# Altium PCB Dev_Board.PcbDoc
Units mm, origin at the board's own origin, x right, y up, seen from the top; angles counter-clockwise.
Board outline 70 x 60 mm, 2 copper layers (Top Layer, Bottom Layer); 59 components, 47 nets, 260 pads, 16 vias.
Unrouted connection lines stored in the file: 86.
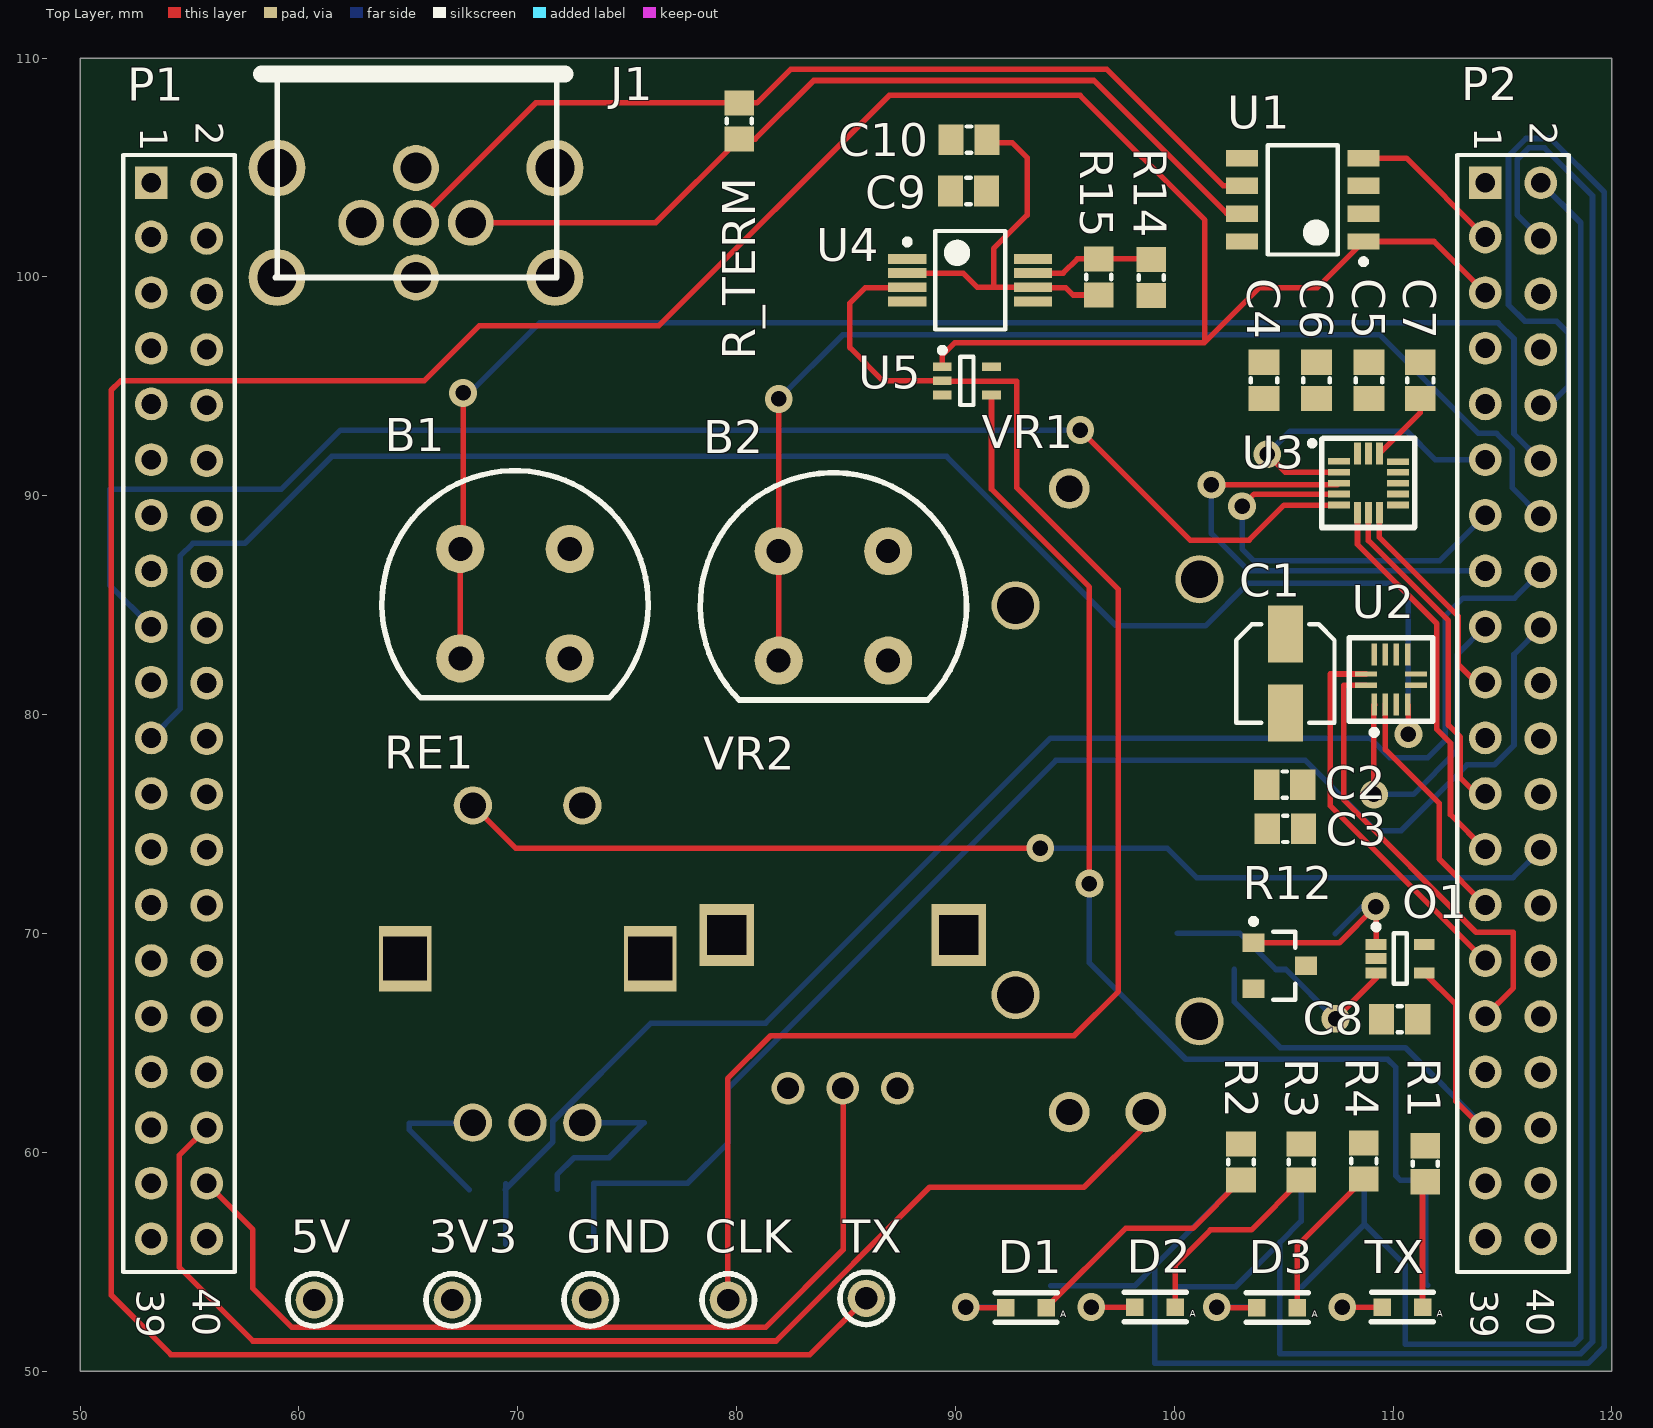
[diagram p0: Top Layer view]
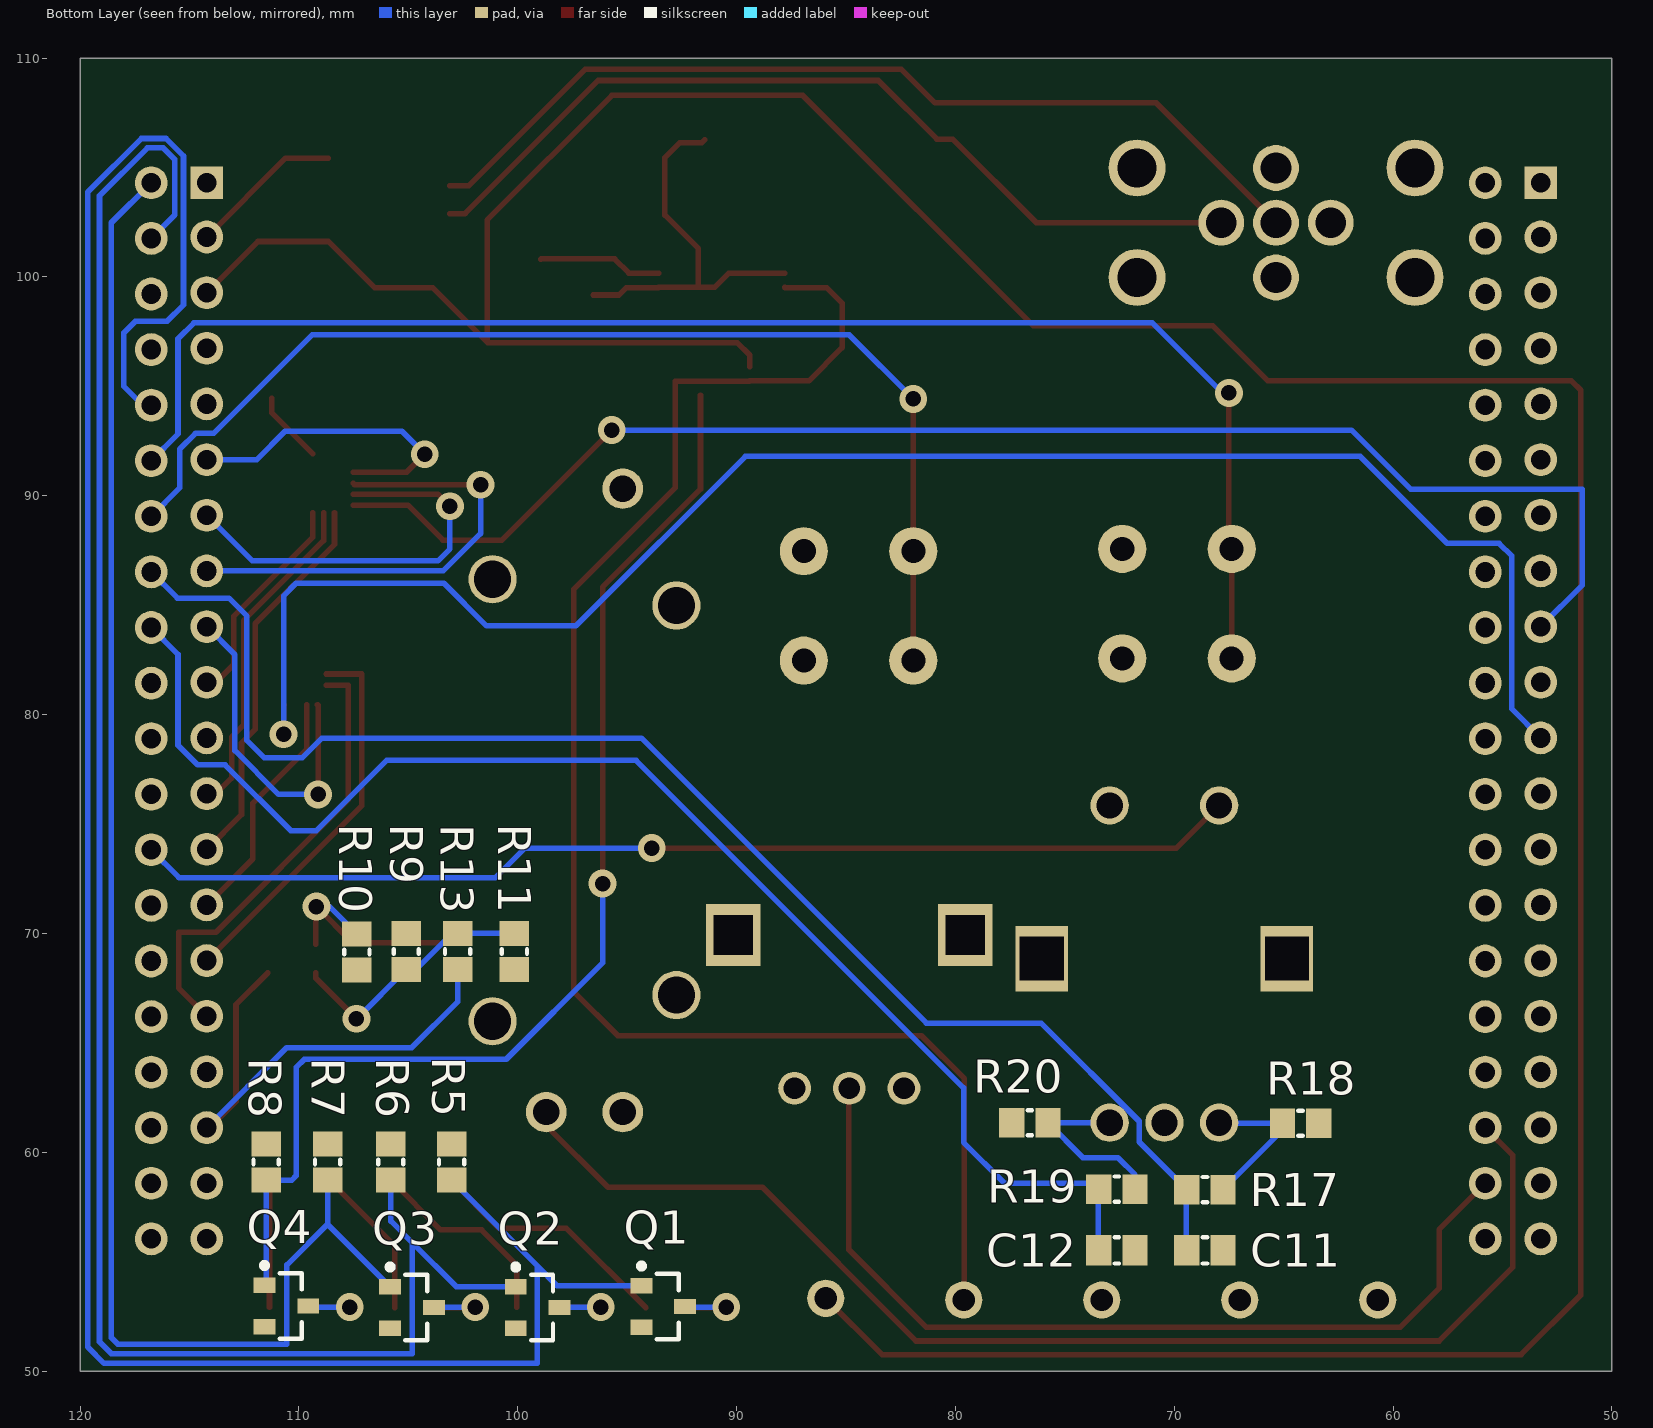
[diagram p1: Bottom Layer view, seen from below]
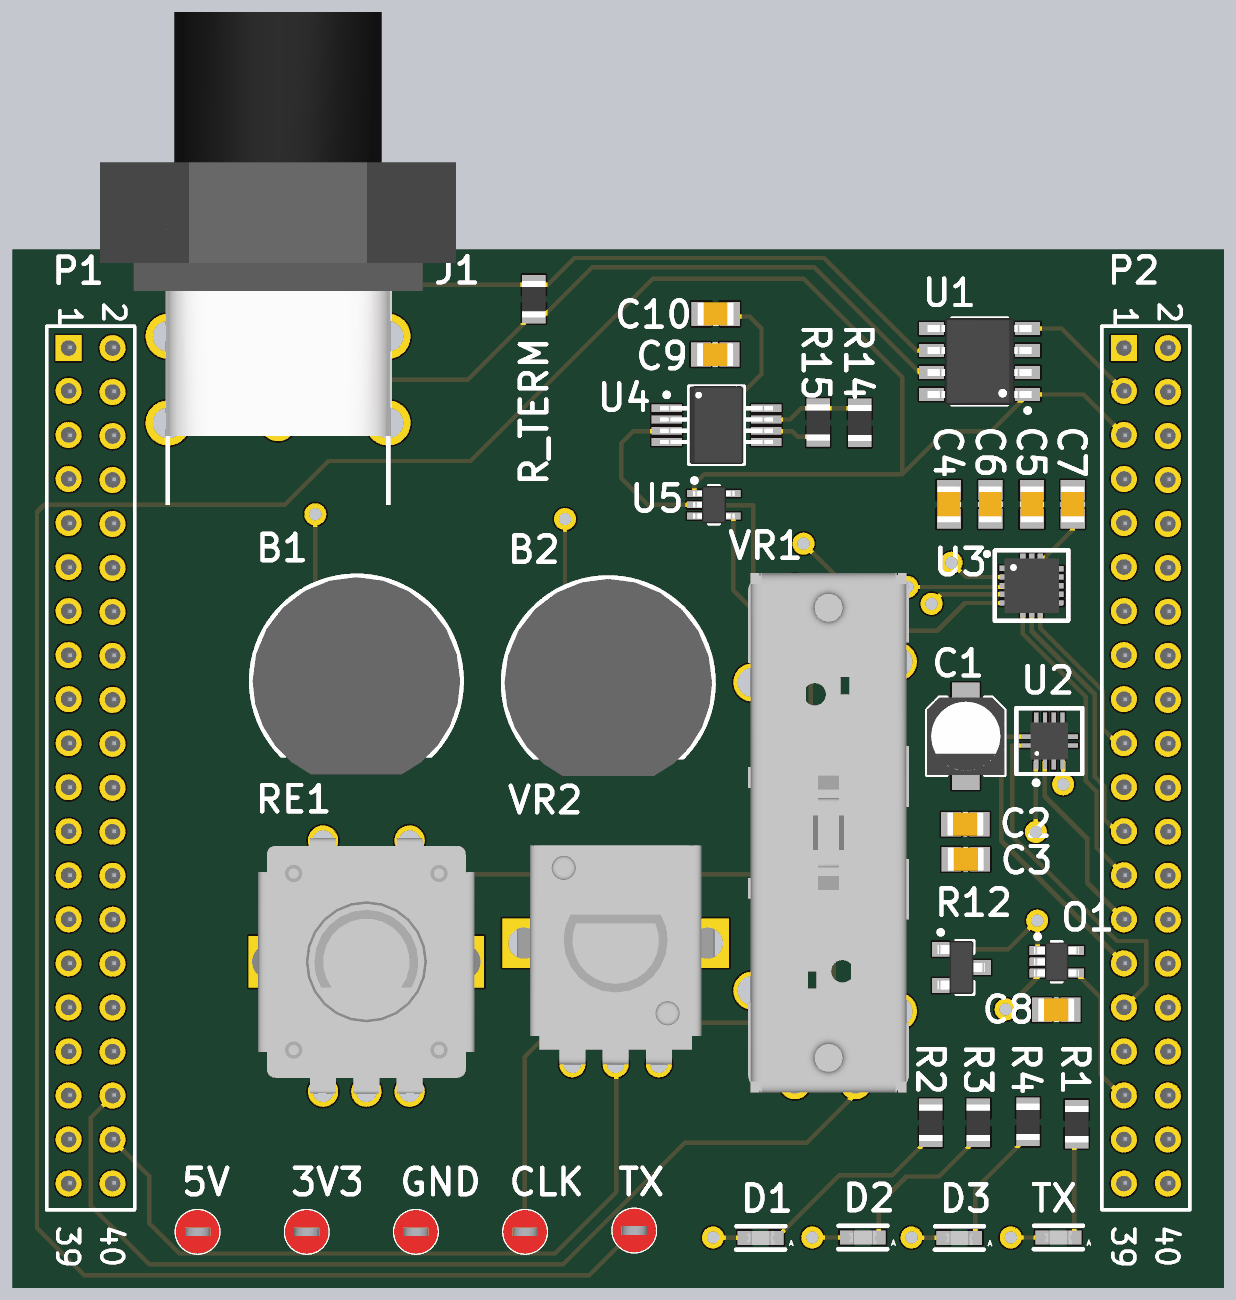
[diagram p2: 3D render of the assembled board from above, using the file's embedded part models]
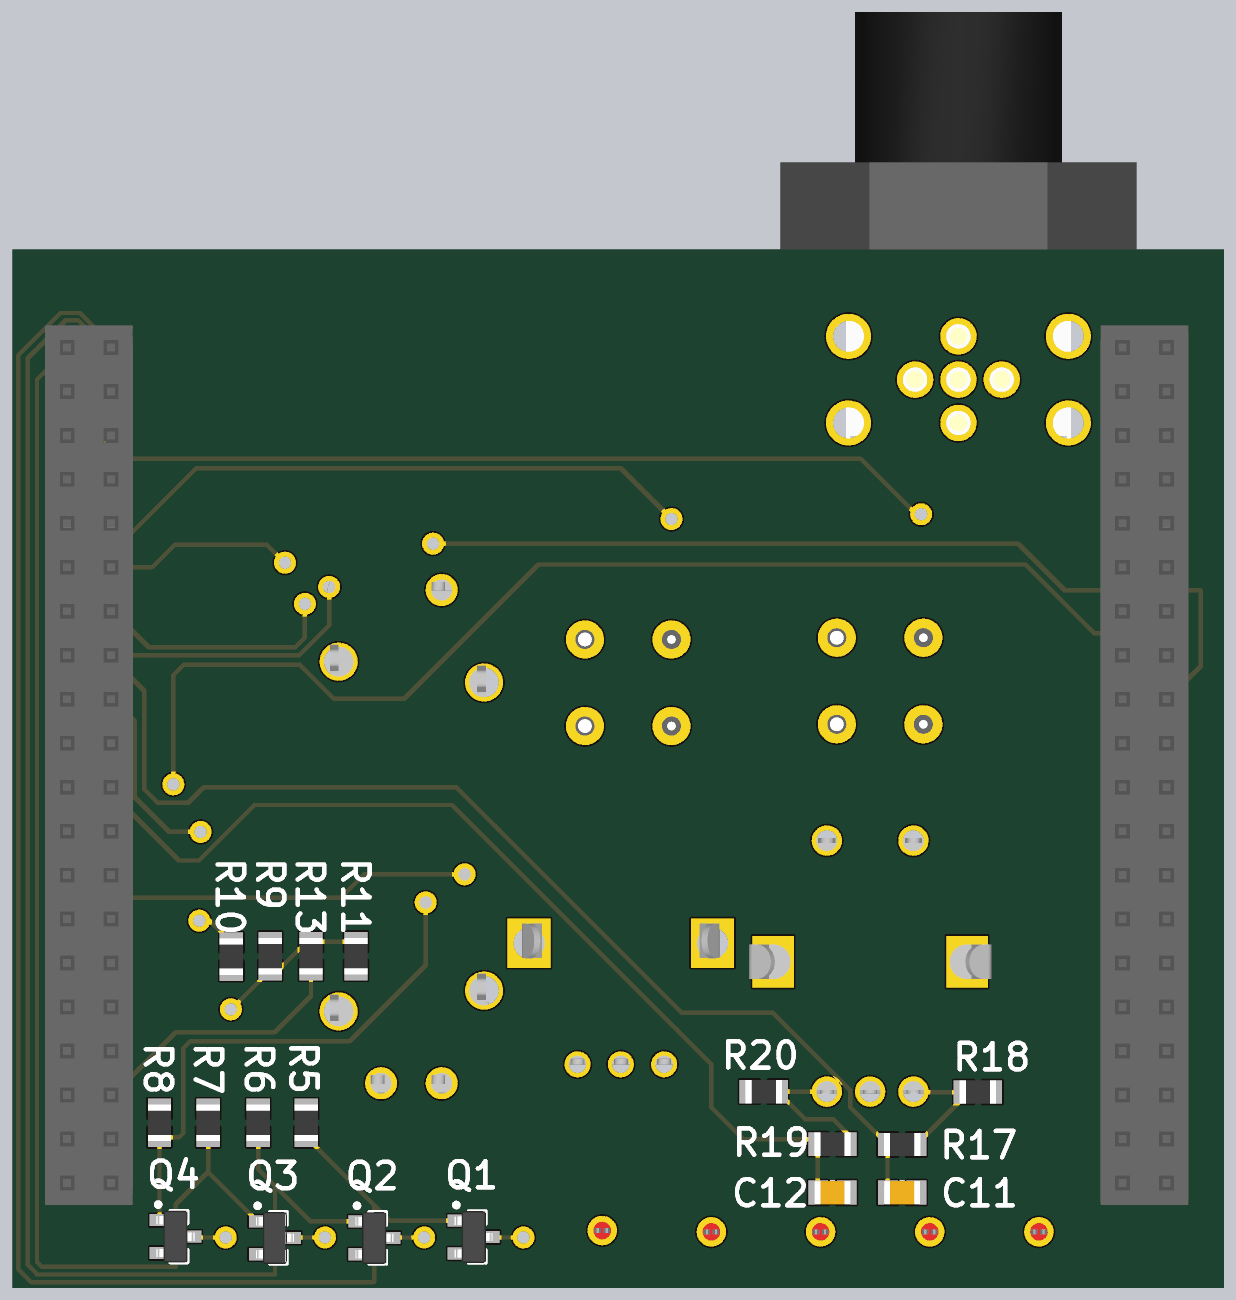
[diagram p3: 3D render of the assembled board from below, using the file's embedded part models]

## Layer stack, top to bottom
Top Solder: solder mask 0.0102, Solder Resist, Dk 3.5
Top Layer: signal copper 0.0356
Dielectric 1: dielectric 0.32, FR-4, Dk 4.8
Bottom Layer: signal copper 0.0356
Bottom Solder: solder mask 0.0102, Solder Resist, Dk 3.5

## Board outline
50,50 50,110 120,110 120,50

## Design rules (kind name [scope] priority, off if disabled: settings)
Clearance [All] p1: gap=0.254 ignorepadtopadclearanceinfootprint=TRUE except(0: Arc-Arc Arc-Track Arc-SMDPad Arc-THPad Arc-Via Arc-Fill Arc-Poly Arc-Region Arc-Text Arc-Hole Track-Track Track-SMDPad Track-THPad Track-Via Track-Fill Track-Poly Track-Region Track-Text Track-Hole SMDPad-Hole THPad-Hole Via-Hole Fill-Hole Poly-Hole Region-Hole Text-Hole)
PolygonConnect [All] p1: connectstyle=Relief reliefconductorwidth=0.254 reliefentries=4 polygonreliefangle="90 Angle" airgapwidth=0.254
RoomDefinition U_555_OSC [InComponentClass('U_555_OSC')] p1: confinementstyle=ConfineIn formatcopy=TRUE lockcomponents=FALSE outline 83.175,96.9 100.525,96.9 100.525,107.775 83.175,107.775
RoomDefinition TEST_POINTS [InComponentClass('Components Class 5')] p2: confinementstyle=ConfineIn formatcopy=TRUE lockcomponents=FALSE outline 57.925,58.85 89.675,58.85 89.675,49.525 57.925,49.525
RoomDefinition U_TEMP_SENSE [InComponentClass('U_TEMP_SENSE')] p3: confinementstyle=ConfineIn formatcopy=TRUE lockcomponents=FALSE outline 98.6,64.225 112.825,64.225 112.825,73.108 98.6,73.108
RoomDefinition U_INPUTS [InComponentClass('U_INPUTS')] p4: confinementstyle=ConfineIn formatcopy=TRUE lockcomponents=FALSE outline 60.525,51.768 103.9,51.768 103.9,93.185 60.525,93.185
RoomDefinition U_GYRO [InComponentClass('U_GYRO')] p5: confinementstyle=ConfineIn formatcopy=TRUE lockcomponents=FALSE outline 99.125,84.425 114.7,84.425 114.7,99.35 99.125,99.35
RoomDefinition U_Connector [InComponentClass('U_Connector')] p6: confinementstyle=ConfineIn formatcopy=TRUE lockcomponents=FALSE outline 54.383,94.175 82.45,94.175 82.45,124.251 54.383,124.251
RoomDefinition U_ACCELEROMETER [InComponentClass('U_ACCELEROMETER')] p7: confinementstyle=ConfineIn formatcopy=TRUE lockcomponents=FALSE outline 113.329,73.75 113.329,87.616 99.675,87.616 99.675,73.75
RoutingVias [All] p1: holewidth=0.711 width=1.27 viastyle="Through Hole" minholewidth=0.711 minwidth=1.27 maxholewidth=0.711 maxwidth=1.27
SolderMaskExpansion [All] p1: expansion=0.102
Width [All] p1: maxlimit=0.254 minlimit=0.254 preferedwidth=0.254
30 further rules are at their usual default settings.

## Classes and differential pairs
component class Main: 3V3 5V CLK D4 GND P1 P2
component class U_555_OSC: C9 C10 R14 R15 U4
component class U_ACCELEROMETER: C1 C2 C3 U2
component class U_Connector: J1 R_TERM
component class U_D-FLIP-FLOP: U5
component class U_GYRO: C4 C5 C6 C7
component class U_INPUTS: B1 B2 C11 C12 R17 R18 R19 R20 RE1 VR1 VR2
component class U_LEDS: D1 D2 D3 D4 Q1 Q2 Q3 Q4 R1 R2 R3 R4 R5 R6 R7 R8
component class U_TEMP_SENSE: C8 O1 R9 R10 R11 R12 R13
component class U_Transeiver: U1
component class "Components Class 1": 3V3 5V CLK D4 GND
component class "Components Class 2": P1 P2
component class "Components Class 3": D1 D2 D3 D4
component class "Components Class 4": C11 C12 D1 D2 D3 TX
component class "Components Class 5": 3V3 5V CLK GND TX

## Components (designator, comment, footprint, x,y, rotation, side; value= is the part's Value field where it differs from the comment)
3V3 "Keystone Electronics 5000" "TEST POINT 5000K" 67.006,53.25 r0 top (schematic designator TP3)
5V "Keystone Electronics 5000" "TEST POINT 5000K" 60.7,53.25 r0 top (schematic designator TP4)
B1 "D6R90 F1 LFS" MomentaryButton 69.875,85.068 r0 top
B2 "D6R90 F1 LFS" MomentaryButton 84.425,84.968 r0 top
C1 "875105240001" "Aluminum Cap 875105240001" 105.075,81.875 r270 top
C2 "C0805C104K5RACTU" CAP0805 105.05,76.8 r180 top
C3 "C0805C104K5RACTU" CAP0805 105.075,74.775 r180 top
C4 "C0805C104K5RACTU" CAP0805 104.1,95.275 r270 top
C5 "C0805C104K5RACTU" CAP0805 108.9,95.275 r270 top
C6 "C2012JB1V106K125AC" CAP0805 106.5,95.275 r270 top
C7 "CGA4C2C0G1H103J060AA" CAP0805 111.25,95.275 r270 top
C8 "C0805C104K5RACTU" CAP0805 110.3,66.075 r0 top
C9 "CGA4C2C0G1H103J060AA" CAP0805 90.6,103.925 r0 top
C10 "C2012JB1V106K125AC" CAP0805 90.625,106.275 r0 top
C11 "CGA4C2C0G1H103J060AA" CAP0805 68.6,55.518 r180 bottom
C12 "CGA4C2C0G1H103J060AA" CAP0805 72.625,55.518 r0 bottom
CLK "Keystone Electronics 5000" "TEST POINT 5000K" 79.619,53.25 r0 top (schematic designator TP2)
D1 "SMLE12BC7TT86" SMLE12BC7TT86 92.3,52.9 r0 top
D2 "SML-D12U8WT86" SML-D12U8WT86 98.2,52.925 r0 top
D3 "SML-D12M8WT86" SML-D12M8WT86 103.775,52.9 r0 top
GND "Keystone Electronics 5000" "TEST POINT 5000K" 73.313,53.25 r0 top (schematic designator TP5)
J1 "MOLEX 84864-9003" "MOLEX 84864-9003" 65.35,102.477 r0 top
O1 "MCP6241U" MCP6241U 110.325,68.85 r0 top
P1 "Female Header 20x2_BOTTOM" "FEMALE HDR2X20_BOTTOM" 53.25,104.3 r270 top locked
P2 "Female Header 20x2_BOTTOM" "FEMALE HDR2X20_BOTTOM" 114.21,104.3 r270 top locked
Q1 "2N7002P,215" 2N7002P,215 93.35,52.95 r180 bottom
Q2 "2N7002P,215" 2N7002P,215 99.092,52.905 r180 bottom
Q3 "2N7002P,215" 2N7002P,215 104.833,52.905 r180 bottom
Q4 "2N7002P,215" 2N7002P,215 110.575,52.975 r180 bottom
R1 "ERJ-6ENF64R9V" RES0805 111.475,59.475 r90 top
R2 "CRCW080588R7FKEA" RES0805 103.05,59.55 r90 top
R3 "RMCF0805JT56R0" RES0805 105.8,59.55 r90 top
R4 "RMCF0805JT56R0" RES0805 108.667,59.6 r90 top
R5 "RC0805FR-0710KL" RES0805 103.025,59.55 r270 bottom
R6 "RMCF0805FT10K0" RES0805 105.8,59.55 r270 bottom
R7 "RMCF0805FT10K0" RES0805 108.692,59.55 r270 bottom
R8 "RMCF0805FT10K0" RES0805 111.5,59.55 r270 bottom
R9 "RC0805FR-0756KL" RES0805 105.1,69.175 r90 bottom
R10 "RC0805FR-0756KL" RES0805 107.35,69.15 r270 bottom
R11 "ERJ-6ENF1131V" RES0805 100.15,69.175 r90 bottom
R12 "G-NICO-001" G-NICO-001 104.825,68.525 r0 top
R13 "RC0805FR-0739KL" RES0805 102.75,69.175 r270 bottom
R14 "ERJ-6ENF8871V" RES0805 98.95,99.975 r270 top
R15 "RC0805FR-0710KL" RES0805 96.55,100 r90 top
R17 "RC0805FR-0710KL" RES0805 68.6,58.293 r0 bottom
R18 "RC0805FR-0710KL" RES0805 64.225,61.325 r0 bottom
R19 "RC0805FR-0710KL" RES0805 72.625,58.318 r0 bottom
R20 "RC0805FR-0710KL" RES0805 76.6,61.35 r0 bottom
R_TERM "DNP" RES0805 80.125,107.125 r270 top (schematic designator R16)
RE1 "PEC12R-4217F-S0024" "Bourns Inc. PEC12R-4217F-S0024" 67.95,61.35 r0 top
TX "SML-511WWT86" SML-511WWT86 109.495,52.925 r0 top (schematic designator D4)
TX "Keystone Electronics 5000" "TEST POINT 5000K" 85.925,53.325 r0 top (schematic designator TP1)
U1 "SN65HVD234" SN65HVD234DR 105.875,103.525 r180 top
U2 "LIS2HH12TR" LIS2HH12TR 109.9,81.6 r90 top
U3 "L3GD20HTR" L3GD20HTR 108.875,90.575 r0 top
U4 "NE555PWR" TSOP65P650X120-8N 90.675,99.85 r0 top
U5 "SN74AUP1G79DCKR" SOT65P210X110-5N 90.525,95.25 r0 top
VR1 "PTA1543-2010CIB103" PTA1543-2010CIB103 96.95,76.085 r90 top
VR2 "PTV09A-4015F-B103" PTV09A-4015F-B103 84.85,62.925 r0 top

## Footprints (in the part's own frame and the unit in brackets; to place one, negate y for a bottom-side part, rotate by r counter-clockwise, add the part's x,y. Pads: shape width x height; smd on the part's side, far side on the other; paste and mask are expansions set on the pad)
2N7002P,215 [mm] "MOSFET N-CH 60V 0.36A SOT-23"
  rect 1x0.7 smd: D(1,0) G(-1,0.95) S(-1,-0.95)
  silkscreen extent -1.13,-1.5 0.7,1.97, body extent -1.1,-1.5 1.1,1.5, height 1.1
"Aluminum Cap 875105240001" [mm] "Aluminum Polymer Capacitor Radial, Can - SMD 45 mOhm 2000 Hrs @ 105°C"
  rect 2.6x1.6 smd: 1(-1.8,0) 2(1.8,0)
  silkscreen extent -2.25,-2.25 2.25,2.25, body extent -2.25,-2.25 2.25,2.25, height 6.3
"Bourns Inc. PEC12R-4217F-S0024" [mm] "ENCODER ROTARY"
  round 1.75 hole 1.2: 1(0,0) 2(2.5,0) 3(5,0) 4(0,14.5) 5(5,14.5)
  rect 2.4x3 hole 2 square unplated: 2(-3.1,7.5) 2(8.1,7.5)
  body extent -4.5,-0.1 9.5,14.65, height 17.5
CAP0805 [mm] "Capacitor with Footprint 0805"
  rect 1.15x1.4 smd: 1(-0.825,0) 2(0.825,0)
  silkscreen extent -0.1,-0.6 0.1,0.6, body extent -1.05,-0.67 1.05,0.68, height 1.55
"FEMALE HDR2X20_BOTTOM" [mm] "Connector; Header; 20x2 Position"
  rect 1.5x1.5 hole 0.9: 1(0,0)
  round 1.5 hole 0.9: 2(0,2.54) 3(2.475,0) 4(2.54,2.54) 5(5.019,0) 6(5.08,2.54) 7(7.562,0) 8(7.62,2.54) 9(10.106,0) 10(10.16,2.54) 11(12.649,0) 12(12.7,2.54) 13(15.193,0) 14(15.24,2.54) 15(17.737,0) 16(17.78,2.54) 17(20.28,0) 18(20.32,2.54) 19(22.824,0) 20(22.86,2.54) 21(25.367,0) 22(25.4,2.54) 23(27.911,0) 24(27.94,2.54) 25(30.455,0) 26(30.48,2.54) 27(32.998,0) 28(33.02,2.54) 29(35.542,0) 30(35.56,2.54) 31(38.086,0) 32(38.1,2.54) 33(40.629,0) 34(40.64,2.54) 35(43.173,0) 36(43.18,2.54) 37(45.716,0) 38(45.72,2.54) 39(48.26,0) 40(48.26,2.54)
  silkscreen extent -1.27,-1.27 49.78,3.81, body extent -1.31,-1.18 49.49,3.9, height 2.7
G-NICO-001 [mm] "RTD -55°C ~ 150°C TO-236-3, SC-59, SOT-23-3"
  rect 1x0.85 smd: 1(-1.2,1.05) 2(-1.2,-1.05) 3(1.2,0)
  silkscreen extent -1.32,-1.55 0.7,2.15, body extent -1.37,-1.53 1.37,1.53, height 1.12
L3GD20HTR [mm] "IC MEMS MOTION SENSOR 16LLGA"
  rect 1x0.31 smd: 1(-1.35,1) 2(-1.35,0.5) 3(-1.35,0) 4(-1.35,-0.5) 5(-1.35,-1) 9(1.35,-1) 10(1.35,-0.5) 11(1.35,0) 12(1.35,0.5) 13(1.35,0.975)
  rect 0.31x1 smd: 6(-0.5,-1.35) 7(0,-1.35) 8(0.5,-1.35) 14(0.5,1.35) 15(0,1.35) 16(-0.5,1.35)
  silkscreen extent -2.69,-2.02 2.12,2.05, body extent -1.58,-1.58 1.58,1.58, height 1
LIS2HH12TR [mm] "ACCELEROMETER 2-8G I2C/SPI 12LGA"
  rect 1x0.25 smd: 1(-1.143,0.762) 2(-1.143,0.254) 3(-1.143,-0.254) 4(-1.143,-0.762) 7(1.143,-0.762) 8(1.143,-0.254) 9(1.143,0.254) 10(1.143,0.762)
  rect 0.25x1 smd: 5(-0.254,-1.143) 6(0.254,-1.143) 11(0.254,1.143) 12(-0.254,1.143)
  silkscreen extent -2.54,-1.91 1.91,1.91, body extent -1.07,-1.07 1.08,1.08, height 1
MCP6241U [mm] "General Purpose Amplifier Circuit Rail-to-Rail SC-70-5"
  rect 0.95x0.5 smd: 1(-1.1,0.65) 2(-1.1,0) 3(-1.1,-0.65) 4(1.1,-0.65) 5(1.1,0.65)
  silkscreen extent -1.22,-1.15 0.3,1.57, body extent -1.3,-1.12 1.3,1.12, height 1.1
"MOLEX 84864-9003" [mm] "CONN RCPT MALE M12 5POS SLDR"
  round 2.1 hole 1.397: 1(0,2.502) 2(-2.502,0) 3(0,-2.502) 4(2.502,0) 5(0,0)
  round 2.6 hole 1.778: 6(6.35,2.502) 7(6.35,-2.502) 8(-6.35,2.502) 9(-6.35,-2.502)
  silkscreen extent -7.07,-2.5 6.82,6.8, body extent -10.28,-7.25 10.28,21.25, height 20.54
MomentaryButton [mm]
  round 2.2 hole 1.1: 1(2.5,2.5) 2(2.5,-2.5) 3(-2.5,-2.5) 4(-2.5,2.5)
  silkscreen extent -6.08,-4.3 6.08,6.08, body extent -6,-5.4 6,6, height 14.3
PTA1543-2010CIB103 [mm] "POT SLIDE 10K OHM .05W 15MM"
  round 1.85 hole 1.2: 1(-14.25,1.75) 2(-14.25,-1.75) 3(14.24,1.75)
  round 2.2 hole 1.7: 4(-8.9,4.2) 5(-10.1,-4.2) 6(8.9,4.2) 7(10.1,-4.2)
  body extent -14.79,-4.85 15.21,4.45, height 16.5
PTV09A-4015F-B103 [mm] "POT 10K OHM 1/20W CARBON LINEAR"
  round 1.5 hole 1: 1(-2.5,0) 2(0,0) 3(2.5,0)
  rect 2.5x2.85 hole 1.8 square: 4(-5.3,7) 5(5.3,7)
  body extent -5.7,0 5.7,12.65, height 15
RES0805 [mm] "Resistor with 0805 Footprint"
  rect 1.15x1.35 smd: 1(-0.825,0) 2(0.825,0)
  silkscreen extent -0.1,-0.58 0.1,0.58, body extent -1.05,-0.67 1.05,0.67, height 0.6
SML-511WWT86 [mm] "LED YELLOW DIFFUSED 0603 SMD"
  rect 0.8x0.8 smd: 1(0,0) 2(1.85,0)
  silkscreen extent -0.49,-0.67 2.35,0.67, body extent 0.13,-0.4 1.73,0.4, height 0.39
SML-D12M8WT86 [mm] "LED GREEN DIFFUSED 0603 SMD"
  rect 0.8x0.8 smd: 1(0,0) 2(1.85,0)
  silkscreen extent -0.49,-0.67 2.35,0.67, body extent 0.13,-0.4 1.73,0.4, height 0.39
SML-D12U8WT86 [mm] "LED RED DIFFUSED 0603 SMD"
  rect 0.8x0.8 smd: 1(0,0) 2(1.85,0)
  silkscreen extent -0.49,-0.67 2.35,0.67, body extent 0.13,-0.4 1.73,0.4, height 0.39
SMLE12BC7TT86 [mm] "LED BLUE CLEAR 0603 SMD"
  rect 0.8x0.8 smd: 1(0,0) 2(1.85,0)
  silkscreen extent -0.49,-0.67 2.35,0.67, body extent 0.13,-0.4 1.73,0.4, height 0.39
SN65HVD234DR [mm] "IC CAN TRANSCEIVER 3.3V 8-SOIC"
  rect 1.45x0.75 smd: 1(-2.775,1.905) 2(-2.775,0.635) 3(-2.775,-0.635) 4(-2.775,-1.905) 5(2.775,-1.905) 6(2.775,-0.635) 7(2.775,0.635) 8(2.775,1.905)
  silkscreen extent -2.9,-2.5 1.6,2.95, body extent -3,-2.5 3,2.5, height 1.75
SOT65P210X110-5N [mm] "SOT23, 5-Leads, Body 2.00x2.10mm, Pitch 0.65mm, IPC Medium Density"
  rect 0.85x0.4 smd: 1(-1.125,0.65) 2(-1.125,0) 3(-1.125,-0.65) 4(1.125,-0.65) 5(1.125,0.65)
  silkscreen extent -1.25,-1.1 0.3,1.52, body extent -1.2,-1.07 1.2,1.07, height 1.1
"TEST POINT 5000K" [mm] "Test Point, 5000 Keystone Series, 0.040\" Hole"
  round 1.7 hole 1.02 mask+0.1: 1(0,0)
  silkscreen extent -1.2,-1.2 1.2,1.2, body extent -1.27,-1.27 1.27,1.27, height 4.42
TSOP65P650X120-8N [mm] "TSOP, 8-Leads, Body 4.40x3.00mm, Pitch 0.65mm, IPC Medium Density"
  rect 1.75x0.45 smd: 1(-2.875,0.975) 2(-2.875,0.325) 3(-2.875,-0.325) 4(-2.875,-0.975) 5(2.875,-0.975) 6(2.875,-0.325) 7(2.875,0.325) 8(2.875,0.975)
  silkscreen extent -3,-2.25 1.6,2.25, body extent -3.25,-2.25 3.25,2.25, height 1.2

## Part data
3V3 5V CLK GND TX: "TEST POINT PC MINI .040\"D RED", Supplier Part Number 1=36-5000-ND, Mounting Type="0.040\" (1.02mm) Hole Diameter", Supplier 1=Digi-Key, Type="PC Test Point, Miniature"
B1 B2: "SWITCH PUSH SPST-NO 0.1A 32V", Current Rating="100ma (DC)", Supplier Part Number 1=401-1978-ND, Voltage Rating - DC=32V, Detailed Description="Pushbutton Switch SPST-NO Keyswitch Through Hole", Electrical Life="250,000 Cycles", Mounting Type="Through Hole", Supplier 1=Digi-Key, Switch Function=Off-Mom
C1: "CAP ALUM POLY 10UF 20% 10V SMD", Capacitance=10µF, ESR (Equivalent Series Resistance)="45 mOhm", Lifetime @ Temp.="2000 Hrs @ 105°C", Operating Temperature="-55°C ~ 105°C", Package / Case="Radial, Can - SMD", Ripple Current - High Frequency="1.2A @ 100kHz", Ripple Current - Low Frequency="60mA @ 120Hz", Supplier Part Number 1=732-6401-1-ND, Tolerance=±20%, Voltage - Rated=10V, Applications="General Purpose", Height - Seated (Max)="0.217\" (5.50mm)", Size / Dimension="0.157\" Dia (4.00mm)", Supplier 1=Digi-Key, Surface Mount Land Size="0.169\" L x 0.169\" W (4.30mm x 4.30mm)", Type=Polymer
C2 C3 C4 C5 C8: "CAP CER 0.1UF 50V X7R 0805", Capacitance=0.1µF, Package / Case=0805, Supplier Part Number 1=399-1170-1-ND, Temperature Coefficient=X7R, Tolerance=±10%, Voltage - Rated=50V, Supplier 1=Digi-Key
C6 C10: "CAP CER 10UF 35V JB 0805", Capacitance=10uF, Package / Case=0805, Supplier Part Number 1=445-11517-1-ND, Tolerance=±20%, Voltage - Rated=35V, Supplier 1=Digi-Key
C7 C11 C12: "CAP CER 10000PF 50V C0G 0805", Capacitance=10nF, Operating Temperature="-55°C ~ 125°C", Package / Case=0805, Supplier Part Number 1=445-6947-1-ND, Tolerance=±5%, Voltage - Rated=50V, Supplier 1=Digi-Key, Thickness=0.7mm
C9: "CAP CER 10000PF 50V C0G 0805", Capacitance=10nf, Operating Temperature="-55°C ~ 125°C", Package / Case=0805, Supplier Part Number 1=445-6947-1-ND, Tolerance=±5%, Voltage - Rated=50V, Supplier 1=Digi-Key, Thickness=0.7mm
D1: "LED BLUE CLEAR 0603 SMD", Color=Blue, Current - Test=5mA, Lens Color=Colorless, Millicandela Rating=22mcd, Package / Case=0603, Supplier Part Number 1=511-1589-1-ND, Voltage - Forward (Vf) (Typ)=2.9V, Lens Style/Size="Rectangle with Flat Top, 1.20mm x 0.80mm", Lens Transparency=Clear, Supplier 1=Digi-Key, Wavelength - Dominant=470nm
D2: "LED RED DIFFUSED 0603 SMD", Color=Red, Current - Test=20mA, Lens Color=White, Millicandela Rating=63mcd, Package / Case=0603, Supplier Part Number 1=511-1580-1-ND, Voltage - Forward (Vf) (Typ)=2.2V, Lens Transparency=Diffused, Supplier 1=Digi-Key, Wavelength - Dominant=620nm
D3: "LED GREEN DIFFUSED 0603 SMD", Color=Green, Current - Test=20mA, Lens Color=White, Millicandela Rating=25mcd, Package / Case=0603, Supplier Part Number 1=511-1578-1-ND, Voltage - Forward (Vf) (Typ)=2.2V, Lens Style/Size="Rectangle with Flat Top, 1.20mm x 0.80mm", Lens Transparency=Diffused, Supplier 1=Digi-Key, Wavelength - Dominant=572nm
J1: "CAN Micro-Change M12, Right Angle, Male", Current Rating=4A, Operating Temperature="-20°C ~ 80°C", Supplier Part Number 1=0848649003-ND, Voltage - Rated="250VAC, 250VDC", Contact Finish=Gold, Detailed Description="5 Position Circular Connector Receptacle, Male Pins Solder Gold", Fastening Type=Threaded, Ingress Protection="IP67 - Dust Tight, Waterproof", Orientation=Keyed, Shell Material, Finish="Brass, Nickel Plated", Supplier 1=Digi-Key
O1: "IC OPAMP GP 550KHZ RRO SC70-5", Current - Input Bias=1pA, Current - Output / Channel=23mA, Current - Supply=50µA, Operating Temperature="-40°C ~ 125°C", Package / Case="5-TSSOP, SC-70-5, SOT-353", Supplier Part Number 1=MCP6241UT-E/LTCT-ND, Voltage - Input Offset=5mV, Voltage - Supply, Single/Dual (±)="1.8 V ~ 5.5 V", -3db Bandwidth=-, Amplifier Type="General Purpose", Gain Bandwidth Product=550kHz, Number of Circuits=1, Output Type=Rail-to-Rail, Slew Rate="0.3 V/µs", Supplier 1=Digi-Key
P1 P2: "CONN HEADR FMALE 20POS .1\" DL AU", Supplier Part Number 1=S9197-ND, Supplier 1=Digi-Key
Q1 Q2 Q3 Q4: "MOSFET N-CH 60V 0.36A SOT-23", Current - Continuous Drain (Id) @ 25°C="360mA (Ta)", Drain to Source Voltage (Vdss)=60V, Drive Voltage (Max Rds On, Min Rds On)=10V, Input Capacitance (Ciss) (Max) @ Vds="50pF @ 10V", Package / Case="TO-236-3, SC-59, SOT-23-3", Power Dissipation (Max)="350mW (Ta)", Supplier Part Number 1=1727-4692-1-ND, FET Type=N-Channel, Gate Charge (Qg) (Max) @ Vgs="0.8nC @ 4.5V", Rds On (Max) @ Id, Vgs="1.6 Ohm @ 500mA, 10V", Supplier 1=Digi-Key, Technology="MOSFET (Metal Oxide)", Vgs (Max)=±20V, Vgs(th) (Max) @ Id  2.4V @=250µA
R1: "RES SMD 64.9 OHM 1% 1/8W 0805", Operating Temperature="-55°C ~ 155°C", Package / Case=0805, Power (Watts)="0.125W, 1/8W", Resistance="64.9 Ohms", Supplier Part Number 1=P64.9CCT-ND, Tolerance=±1%, Detailed Description="±1% 0.125W, 1/8W Chip Resistor 0805 (2012 Metric) Automotive AEC-Q200 Thick Film", Features="Automotive AEC-Q200", Height - Seated (Max)="0.028\" (0.70mm)", Supplier 1=Digi-Key
R2: "RES SMD 88.7 OHM 1% 1/8W 0805", Operating Temperature="-55°C ~ 155°C", Package / Case=0805, Power (Watts)="0.125W, 1/8W", Resistance=88.7, Supplier Part Number 1=541-88.7CCT-ND, Tolerance=±1%, Supplier 1=Digi-Key
R3 R4: "RES SMD 56 OHM 5% 1/8W 0805", Package / Case=0805, Power (Watts)="0.125W, 1/8W", Resistance (Ohms)=56, Supplier Part Number 1=RMCF0805JT56R0CT-ND, Composition="Thick Film", Supplier 1=Digi-Key
R5 R15 R17 R18 R19 R20: "RES SMD 10K OHM 1% 1/8W 0805", Manufacturer=Yageo, Operating Temperature="-55°C ~ 155°C", Package / Case=0805, Power (Watts)="0.125W, 1/8W", Resistance="10 kOhms", Supplier Part Number 1=311-10.0KCRCT-ND, Temperature Coefficient=±100ppm/°C, Tolerance=±1%, Composition="Thick Film", Features="Moisture Resistant", Supplier 1=Digi-Key
R6 R7 R8: "RES SMD 10K OHM 1% 1/8W 0805", Package / Case=0805, Power (Watts)="0.125W, 1/8W", Resistance="10 kOhms", Supplier Part Number 1=RMCF0805FT10K0CT-ND, Tolerance=±1%, Features="Automotive AEC-Q200", Height - Seated (Max)="0.026\" (0.65mm)", Supplier 1=Digi-Key
R9 R10: "RES SMD 56K OHM 1% 1/8W 0805", Operating Temperature="-55°C ~ 155°C", Package / Case=0805, Power (Watts)="0.125W, 1/8W", Resistance=56k, Supplier Part Number 1=311-56.0KCRCT-ND, Temperature Coefficient=±100ppm/°C, Tolerance=±1%, Composition="Thick Film", Features="Moisture Resistant", Supplier 1=Digi-Key
R11: "RES SMD 1.13K OHM 1% 1/8W 0805", Operating Temperature="-55°C ~ 155°C", Power (Watts)="0.125W, 1/8W", Resistance="1.13 kOhms", Supplier Device Package=0805, Supplier Part Number 1=P1.13KCCT-ND, Tolerance=±1%, Detailed Description="±1% 0.125W, 1/8W Chip Resistor 0805 (2012 Metric) Automotive AEC-Q200 Thick Film", Features="Automotive AEC-Q200", Height - Seated (Max)="0.028\" (0.70mm)", Supplier 1=Digi-Key
R12: "SENSOR TEMP RTD 1.0K OHM SOT23", Current=5mA, Manufacturer="TE Connectivity Measurement Specialties", Package / Case="TO-236-3, SC-59, SOT-23-3", Resistance="1 kOhms", Supplier Part Number 1=223-1563-1-ND, Temperature="-55°C ~ 150°C", Supplier 1=Digi-Key, Thermistor Type=RTD
R13: "RES SMD 39K OHM 1% 1/8W 0805", Operating Temperature="-55°C ~ 155°C", Package / Case=0805, Power (Watts)="0.125W, 1/8W", Resistance=39k, Supplier Part Number 1=311-39.0KCRCT-ND, Temperature Coefficient=±100ppm/°C, Tolerance=±1%, Composition="Thick Film", Features="Moisture Resistant", Supplier 1=Digi-Key
R14: "RES SMD 8.87K OHM 1% 1/8W 0805", Operating Temperature="-55°C ~ 155°C", Package / Case=0805, Power (Watts)="0.125W, 1/8W", Resistance="8.87 kOhms", Tolerance=±1%, Features="Automotive AEC-Q200", Height - Seated (Max)="0.028\" (0.70mm)", Supplier 1=Digi-Key
R_TERM: "RES SMD 0.0 OHM JUMPER 1/8W 0805", Package / Case=0805, Power (Watts)="0.125W, 1/8W", Resistance="0 Ohms", Tolerance=Jumper, Supplier 1=Digi-Key, Supplier Part Number 2=311-0.0ARCT-ND
RE1: "ENCODER ROTARY", Supplier Part Number 1=PEC12R-4217F-S0024-ND, Voltage - Supply=-, Actuator Type="6mm Dia Flatted End", Built in Switch=Yes, Detent=Yes, Encoder Type=Mechanical, Mounting Type="PCB, Through Hole", Orientation=Vertical, Output Type="Quadrature (Incremental)", Pulses per Revolution=24, Rotational Life (Cycles Min)=30K, Supplier 1=Digi-Key
TX: "LED YELLOW DIFFUSED 0603 SMD", Colour=Yellow, Current - Test=20mA, Lens Colour=White, Millicandela Rating=40mcd, Package / Case=0603, Voltage - Forward (Vf) (Type)=2V, Detailed Description="Yellow 590nm LED Indication - Discrete 2V 0603 (1608 Metric)", Height - Max=0.65mm, Lens Style/Size="Rectangle with Flat Top, 1.20mm x 0.80mm", Lens Transparancy=Diffused, Mounting Type="Surface Mount", Supplier 1=Digi-Key, Wavelength - Dominant=590nm
U1: "IC CAN TRANSCEIVER 3.3V 8-SOIC", Manufacturer Part Number=SN65HVD234DR, Operating Temperature="-40°C ~ 125°C", Package / Case=8-SOIC, Supplier Part Number 1=296-27991-1-ND, Voltage - Supply="3 V ~ 3.6 V", Data Rate=1Mbps, Duplex=Half, Number of Drivers/Receivers=1/1, Protocol=CAN, Receiver Hysteresis=100mV, Supplier 1=Digi-Key, Type=Transceiver
U2: "ACCELEROMETER 2-8G I2C/SPI 12LGA", Operating Temperature="-40°C ~ 85°C (TA)", Package / Case=12-VFLGA, Supplier Part Number 1=497-15069-1-ND, 1.71 V ~ 3.6 V="Voltage - Supply", Acceleration Range="±2g, 4g, 8g", Axis="X, Y, Z", Bandwidth="5Hz ~ 400Hz", Features="Adjustable Bandwidth, Selectable Scale, Temperature Sensor", Output Type="I²C, SPI", Sensitivity (LSB/g)="16393 (±2g) ~ 4098 (±8g)", Supplier 1=Digi-Key, Type=Digital
U3: "IC MEMS MOTION SENSOR 16LLGA", Current - Supply=5mA, Manufacturer=STMicroelectronics, Operating Temperature="-40°C ~ 85°C (TA)", Package / Case=16-LGA, Supplier Part Number 1=497-13931-1-ND, Voltage - Supply="2.2 V ~ 3.6 V", Axis="X (Pitch), Y (Roll), Z (Yaw)", Bandwidth="6.25Hz ~ 400Hz", Output Type="I²C, SPI", Range °/s="±245, 500, 2000", Sensitivity (LSB/(°/s))="8.75 ~ 70", Supplier 1=Digi-Key, Type=Digital
U4: "IC OSC SGL TIMER 100KHZ 8TSSOP", Current - Supply=10mA, Frequency=100kHz, Operating Temperature="0°C ~ 70°C", Package / Case="8-TSSOP (0.173\", 4.40mm Width)", Supplier Part Number 1=296-29904-1-ND, Voltage - Supply="4.5 V ~ 16 V", Detailed Description="555 Type, Timer/Oscillator (Single) IC 100kHz 8-TSSOP", Mounting Type="Surface Mount", Supplier 1=Digi-Key, Type="555 Type, Timer/Oscillator (Single)"
U5: "IC D-TYPE POS TRG SNGL SC70-5", Clock Frequency=266MHz, Current - Quiescent (Iq)=500nA, Input Capacitance=1.5pF, Operating Temperature="-40°C ~ 85°C (TA)", Package / Case="5-TSSOP, SC-70-5, SOT-353", Supplier Part Number 1=296-17660-1-ND, Voltage - Supply="0.8 V ~ 3.6 V", Max Propagation Delay @ V, Max CL="5.8ns @ 3.3V, 30pF", Number of Bits per Element=1, Number of Elements=1, Output Type=Non-Inverted, Supplier 1=Digi-Key, Trigger Type="Positive Edge", Type=D-Type
VR1: "POT SLIDE 10K OHM .05W 15MM", Power (Watts)="0.05W, 1/20W", Resistance="10 kOhms", Supplier Part Number 1=PTA1543-2010CIB103-ND, Tolerance=±20%, Detailed Description="0.05W, 1/20W Through Hole Slide Potentiometer Top Adjustment Type", Fader Type=Standard, Mounting Type="Through Hole", Supplier 1=Digi-Key, Travel Range=15mm
VR2: "POT 10K OHM 1/20W CARBON LINEAR", Power (Watts)="0.05W, 1/20W", Resistance (Ohms)=10k, Supplier Part Number 1=PTV09A-4015F-B103-ND, Tolerance=±20%, Built in Switch=None, Detailed Description="10k Ohm Gang Linear Through Hole, Snap In Potentiometer None 1 Turn Carbon 0.05W, 1/20W PC Pins, Board Locks", Mounting Type="Through Hole, Snap In", Rotation=280°, Supplier 1=Digi-Key, Termination Style="PC Pins, Board locks"

## Via types
v1: diameter 1.27, hole 0.711, Top Layer to Bottom Layer, 16 vias

## Nets (pads, with @x,y where several pads share a name; then routed paths per layer and width w, separated by ;. In a path a pad name is that pad's centre, name@x,y a point inside that pad or via, vN(x,y) a via of type N, cw(c..) or ccw(c..) an arc to the next point about the centre after c; other vN are vias at no path point)
3V3: 3V3.1 C1.1 C2.2 C3.2 C4.2 C5.2 C6.2 C8.2 O1.5 P1.16 R1.2 R2.2 R3.2 R4.2 R9.2 R10.2 U1.3 U1.5 U2.9 U2.10 U3.1 U3.16 U5.5 VR1.1 VR2.1
5V: 5V.1 C9.2 P1.18 R14.2 R18.1 R20.2 U4.4 U4.8
BUTTON_1: B1.3 B1.4 P2.12 | length 67.9
  Top Layer w0.254: B1.3 B1.4 67.5,87.693 v1(67.5,94.7)
  Bottom Layer w0.254: v1(67.5,94.7) 67.8,94.7 71,97.9 114.8,97.9 115.525,97.175 115.525,92.825 P2.12
BUTTON_2: B2.3 B2.4 P2.14 | length 52.5
  Top Layer w0.254: B2.3 B2.4 v1(81.925,94.425)
  Bottom Layer w0.254: v1(81.925,94.425) 84.85,97.35 109.4,97.35 113.9,92.85 114.725,92.85 115.45,92.125 115.45,90.36 P2.14
CAN_RX: P2.3 U1.4 | length 7.1
  Top Layer w0.254: U1.4 110.605,105.43 P2.3
CAN_TX: P2.5 TX.1@85.925,53.325 U1.1 U5.1 | length 170
  Top Layer w0.254: TX.1@85.925,53.325 83.35,50.75 54.15,50.75 51.425,53.475 51.425,94.825 51.85,95.25 65.725,95.25 68.25,97.775 76.45,97.775 86.975,108.3 95.7,108.3 101.4,102.6 101.4,97.025 ; U5.1 89.4,96.425 89.975,97 101.375,97 101.4,97.025 ; P2.5 111.871,101.62 U1.1 106.53,99.5 103.875,99.5 101.4,97.025
GND: B1.1 B1.2 B2.1 B2.2 C1.2 C2.1 C3.1 C4.1 C5.1 C6.1 C7.1 C8.1 C9.1 C10.1 C11.2 C12.1 GND.1 J1.3 J1.6 J1.7 J1.8 J1.9 O1.2 P1.20 P1.22 Q1.S Q2.S Q3.S Q4.S R5.1 R6.1 R7.1 R8.1 R11.1 R12.2 RE1.2 RE1.5 U1.2 U1.8 U2.3 U2.5 U2.6 U2.7 U2.8 U3.9 U3.10 U3.11 U3.12 U3.13 U3.15 U4.1 U5.3 VR1.3 VR2.3
I2C1_SCL: P2.17 U2.1 | length 15
  Top Layer w0.254: v1(109.125,76.35) 109.125,80.42 109.15,80.445 U2.1
  Bottom Layer w0.254: v1(109.125,76.35) 110.925,76.35 112.925,78.35 112.925,82.735 P2.17
I2C1_SDA: P1.21 U2.4 | length 78.8
  Top Layer w0.254: U2.4 110.7,80.419 v1(110.7,79.1)
  Bottom Layer w0.254: P1.21 54.575,80.258 54.575,87.25 55.15,87.825 57.525,87.825 61.5,91.8 89.6,91.8 97.35,84.05 101.425,84.05 103.375,86 110.125,86 110.7,85.425 v1(110.7,79.1)
NetC7_2: C7.2 U3.14 | length 3.3
  Top Layer w0.254: U3.14 111.25,93.8 C7.2
NetC10_2: C10.2 R15.1 U4.2 U4.6 | length 17.9
  Top Layer w0.254: U4.2 90.35,100.175 91,99.525 91.75,99.525 ; C10.2 91.6,106.125 92.6,106.125 93.275,105.45 93.275,102.825 91.75,101.3 91.75,99.525 ; R15.1 95.375,99.175 95.05,99.5 93.575,99.5 U4.6 91.75,99.525
NetD1_1: D1.1 Q1.D | length 3.7
  Top Layer w0.254: v1(90.475,52.925) 90.5,52.9 D1.1
  Bottom Layer w0.254: v1(90.475,52.925) 92.325,52.925 Q1.D
NetD1_2: D1.2 R2.1 | length 11.3
  Top Layer w0.254: D1.2 97.775,56.525 100.85,56.525 R2.1
NetD2_1: D2.1 Q2.D | length 3.9
  Top Layer w0.254: v1(96.208,52.925) D2.1
  Bottom Layer w0.254: v1(96.208,52.925) 98.072,52.925 Q2.D
NetD2_2: D2.2 R3.1 | length 9.3
  Top Layer w0.254: D2.2 100.05,54.85 101.65,56.45 103.525,56.45 R3.1
NetD3_1: D3.1 Q3.D | length 3.7
  Top Layer w0.254: v1(101.942,52.925) 101.967,52.9 D3.1
  Bottom Layer w0.254: v1(101.942,52.925) 103.813,52.925 Q3.D
NetD3_2: D3.2 R4.1 | length 7.1
  Top Layer w0.254: D3.2 105.625,55.733 R4.1
NetD4_1: Q4.D TX.1@109.495,52.925 | length 3.7
  Top Layer w0.254: v1(107.675,52.925) TX.1@109.495,52.925
  Bottom Layer w0.254: v1(107.675,52.925) 109.525,52.925 Q4.D
NetD4_2: R1.1 TX.2 | length 5.8
  Top Layer w0.254: TX.2 111.345,58.52 R1.1
NetJ1_4: J1.4 R_TERM.2 U1.7 | length 40.5
  Top Layer w0.254: J1.4 76.302,102.477 R_TERM.2 80.85,106.3 83.525,108.975 96.325,108.975 102.41,102.89 U1.7
NetJ1_5: J1.5 R_TERM.1 U1.6 | length 42.9
  Top Layer w0.254: J1.5 70.823,107.95 R_TERM.1 80.927,107.95 82.477,109.5 96.908,109.5 102.248,104.16 U1.6
NetO1_1: O1.1 R10.1 R12.1 | length 10.4
  Top Layer w0.254: R12.1 107.55,69.575 v1(109.2,71.225) 109.225,71.2 O1.1
  Bottom Layer w0.254: R10.1 108.6,71.225 v1(109.2,71.225)
NetO1_3: O1.3 R9.1 R11.2 R13.1 | length 11.7
  Top Layer w0.254: v1(107.375,66.1) 109.225,67.95 O1.3
  Bottom Layer w0.254: R11.2 R13.1 103,70 104.65,68.35 R9.1 107.35,66.1 v1(107.375,66.1)
NetO1_4: O1.4 P2.35 R13.2 | length 23.6
  Top Layer w0.254: O1.4 112.875,66.75 112.875,62.325 114.073,61.127 P2.35
  Bottom Layer w0.254: R13.2 102.75,66.875 104.85,64.775 110.562,64.775 P2.35
NetP1_36: P1.36 VR1.2 | length 57.2
  Top Layer w0.254: P1.36 54.525,59.855 54.525,54.75 57.9,51.375 81.8,51.375 88.825,58.4 95.875,58.4 98.7,61.225 VR1.2
NetP1_38: P1.38 VR2.2 | length 42.2
  Top Layer w0.254: P1.38 57.9,56.47 57.9,53.775 59.675,52 81.325,52 84.875,55.55 84.875,62.9 VR2.2
NetP2_2: P2.2 Q3.G R7.2 | length 74
  Bottom Layer w0.254: Q3.G 105.838,53.855 108.692,56.708 ; R7.2 108.692,56.708 ; P2.2 118.575,102.475 118.575,51.525 118.275,51.225 110.55,51.225 110.55,54.85 108.692,56.708
NetP2_4: P2.4 Q2.G R6.2 | length 89.4
  Bottom Layer w0.254: Q2.G 102.805,53.855 104.825,55.875 ; 104.825,50.787 118.575,50.787 ; 104.825,50.8 104.825,55.875 ; R6.2 105.8,56.85 104.825,55.875 ; P2.4 115.675,102.835 115.675,105.375 116.2,105.9 116.925,105.9 119.125,103.7 ; 118.575,50.8 119.125,51.35 ; 119.112,51.35 119.112,103.7
NetP2_10: P2.10 Q1.G R5.2 | length 108.6
  Bottom Layer w0.254: Q1.G 98.2,53.9 99.1,54.8 ; R5.2 99.1,54.8 ; P2.10 117.14,94.14 118,95 118,97.45 117.475,97.975 116.025,97.975 115.275,98.725 115.275,105.525 116.075,106.325 117.2,106.325 119.65,103.875 119.65,51.1 118.9,50.35 99.1,50.35 99.1,54.8
NetP2_19: P2.19 U3.8 | length 10
  Top Layer w0.254: U3.8 109.375,88.1 112.975,84.5 112.975,82.3 113.799,81.476 P2.19
NetP2_23: P2.23 U3.7 | length 15.3
  Top Layer w0.254: U3.7 108.875,87.95 112.525,84.3 112.525,79.525 113.075,78.975 113.075,77.1 113.786,76.389 P2.23
NetP2_25: P2.25 U3.6 | length 17.8
  Top Layer w0.254: U3.6 108.375,87.775 112,84.15 112,79.325 112.625,78.7 112.625,75.43 P2.25
NetP2_27: P2.27 U2.2 | length 11
  Top Layer w0.254: U2.2 109.646,78.404 112.1,75.95 112.1,73.412 P2.27
NetP2_29: P2.29 U2.11 | length 17.7
  Top Layer w0.254: U2.11 107.129,81.854 107.125,81.85 107.125,75.843 P2.29
NetP2_31: P2.31 U2.12 | length 20.9
  Top Layer w0.254: U2.12 107.75,81.346 107.75,76.1 113.8,70.05 115.5,70.05 115.5,67.504 P2.31
NetQ4_G: Q4.G R8.2 U5.4 | length 55
  Top Layer w0.254: U5.4 91.65,90.3 96.125,85.825 v1(96.125,72.275)
  Bottom Layer w0.254: v1(96.125,72.275) 96.125,68.65 100.525,64.25 109.75,64.25 110.125,63.875 110.125,58.925 110.325,58.725 R8.2 111.5,54 Q4.G
NetR14_1: R14.1 R15.2 U4.7 | length 5.7
  Top Layer w0.254: U4.7 94.925,100.175 95.575,100.825 R15.2 98.925,100.825 R14.1
NetR17_1: R17.1 R18.2 RE1.1 | length 7.1
  Bottom Layer w0.254: R17.1 65.05,61.018 R18.2 67.925,61.325 RE1.1
NetR19_1: R19.1 R20.1 RE1.3 | length 8.4
  Bottom Layer w0.254: R19.1 71.8,58.975 72.575,59.75 74.175,59.75 R20.1 RE1.3
NetTP2_1: CLK.1 U4.3 U5.2 | length 72.9
  Top Layer w0.254: CLK.1@79.594,52.975 79.594,63.369 81.55,65.325 95.425,65.325 97.45,67.35 97.45,85.725 92.8,90.375 92.8,95.225 89.425,95.225 U5.2 86.7,95.25 85.175,96.775 85.175,98.8 85.875,99.5 87.775,99.5 U4.3
RE_A: C11.1 P2.16 R17.2 | length 66.4
  Bottom Layer w0.254: R17.2 R17.2@69.45,58.318 ; C11.1@69.45,55.793 R17.2@69.45,58.318 ; R17.2@69.45,58.568 R17.2@69.45,58.318 ; P2.16 115.555,85.325 113.2,85.325 112.375,84.5 112.375,78.825 111.575,78.025 109.85,78.025 108.95,78.925 94.35,78.925 81.325,65.9 76.083,65.9 71.6,61.417 71.6,60.468 R17.2@69.45,58.318
RE_B: C12.2 P2.18 R19.2 | length 63.1
  Bottom Layer w0.254: C12.2@73.475,55.793 73.475,58.593 77.768,58.593 79.625,60.45 79.625,62.941 94.592,77.908 105.992,77.908 109.2,74.7 110.375,74.7 113.375,77.7 114.625,77.7 115.525,78.6 115.525,82.755 P2.18
RE_SWITCH: P2.26 RE1.4 | length 50.7
  Top Layer w0.254: RE1.4 69.9,73.9 v1(93.875,73.9)
  Bottom Layer w0.254: v1(93.875,73.9) 99.675,73.9 101.025,72.55 115.48,72.55 P2.26
SPI1_MISO: P2.13 U3.4 | length 18.8
  Top Layer w0.254: v1(103.1,89.525) 103.65,90.075 U3.4
  Bottom Layer w0.254: v1(103.1,89.525) 103.1,87.575 103.65,87.025 112.128,87.025 P2.13
SPI1_MOSI: P2.15 U3.3 | length 21.3
  Top Layer w0.254: v1(101.7,90.5) 107.45,90.5 U3.3
  Bottom Layer w0.254: v1(101.7,90.5) 101.7,88.275 103.412,86.563 P2.15
SPI1_NSS: P1.17 U3.5 | length 67.1
  Top Layer w0.254: v1(95.7,93) 100.725,87.975 103.425,87.975 105.025,89.575 U3.5
  Bottom Layer w0.254: P1.17 51.35,85.92 51.35,90.3 59.2,90.3 61.9,93 v1(95.7,93)
SPI1_SCK: P2.11 U3.2 | length 14.5
  Top Layer w0.254: v1(104.25,91.9) 105.075,91.075 U3.2
  Bottom Layer w0.254: v1(104.25,91.9) 105.3,92.95 110.625,92.95 111.924,91.651 113.651,91.651 P2.11
pads on no net: J1.1 J1.2 P1.1 P1.2 P1.3 P1.4 P1.5 P1.6 P1.7 P1.8 P1.9 P1.10 P1.11 P1.12 P1.13 P1.14 P1.15 P1.19 P1.23 P1.24 P1.25 P1.26 P1.27 P1.28 P1.29 P1.30 P1.31 P1.32 P1.33 P1.34 P1.35 P1.37 P1.39 P1.40 P2.1 P2.6 P2.7 P2.8 P2.9 P2.20 P2.21 P2.22 P2.24 P2.28 P2.30 P2.32 P2.33 P2.34 P2.36 P2.37 P2.38 P2.39 P2.40 R12.3 U4.5 VR1.4 VR1.5 VR1.6 VR1.7 VR2.4 VR2.5

## Text inside footprints (layer, text, board x,y; h text height)
D1: Top Overlay "A" at 94.8,52.45 h0.3
D2: Top Overlay "A" at 100.7,52.475 h0.3
D3: Top Overlay "A" at 106.275,52.45 h0.3
P1: Top Overlay "1" at 52.742,106.84 h1.27 r270; Top Overlay "2" at 55.282,107.095 h1.27 r270; Top Overlay "39" at 52.6,53.725 h1.27 r270; Top Overlay "40" at 55.15,53.775 h1.27 r270
P2: Top Overlay "1" at 113.702,106.84 h1.27 r270; Top Overlay "2" at 116.242,107.1 h1.27 r270; Top Overlay "39" at 113.56,53.725 h1.27 r270; Top Overlay "40" at 116.11,53.775 h1.27 r270
TX: Top Overlay "A" at 111.995,52.475 h0.3